# Altium PCB macropad.PcbDoc
Units mm, origin at the board's own origin, x right, y up, seen from the top; angles counter-clockwise.
Board outline 83 x 85 mm, 2 copper layers (Top Layer, Bottom Layer); 70 components, 69 nets, 364 pads, 191 vias.
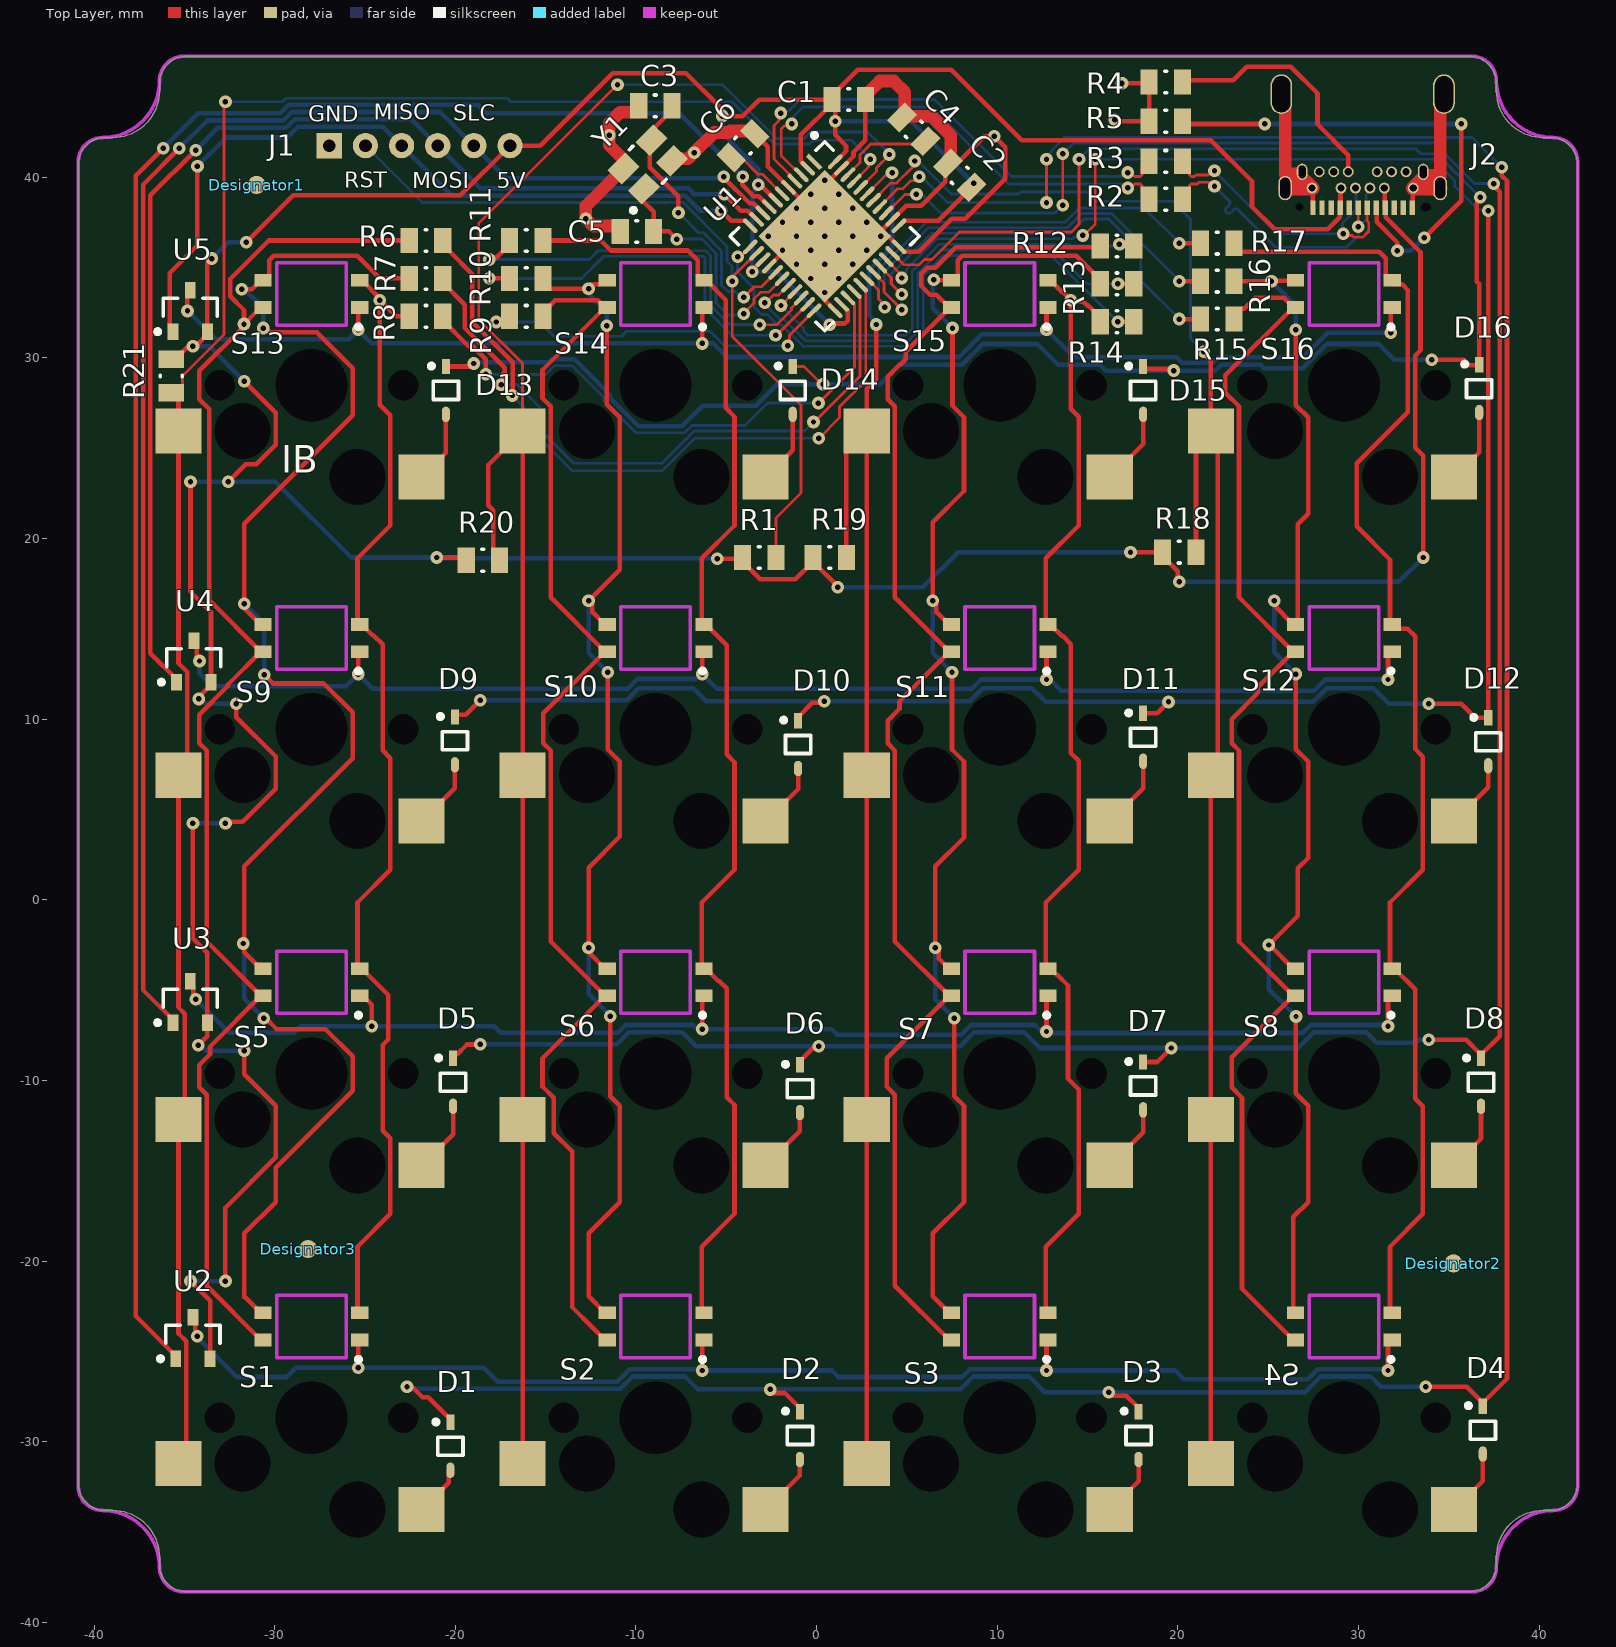
[diagram p0: Top Layer view]
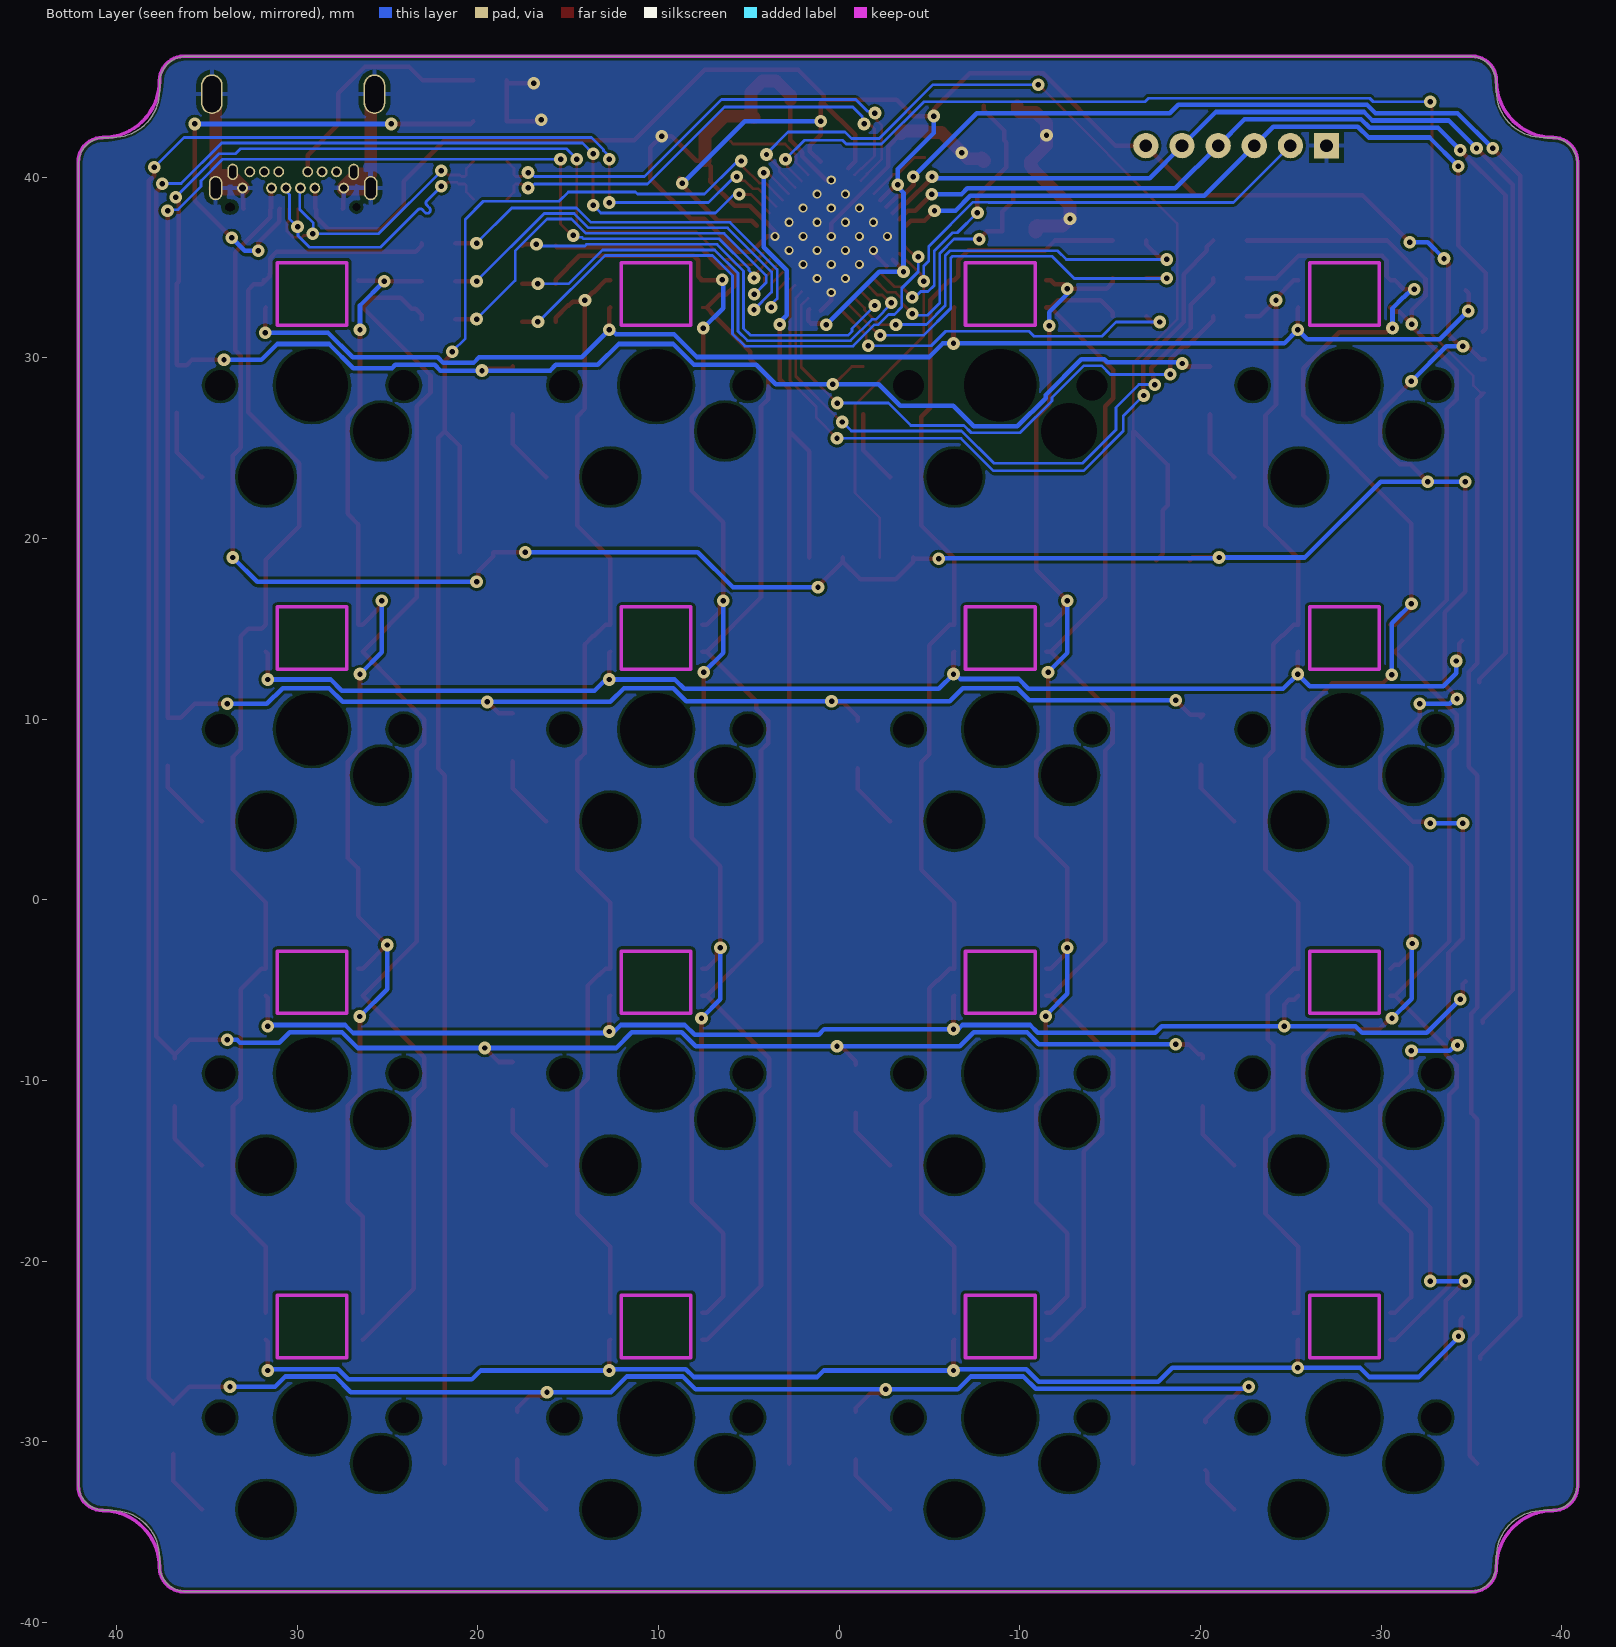
[diagram p1: Bottom Layer view, seen from below]
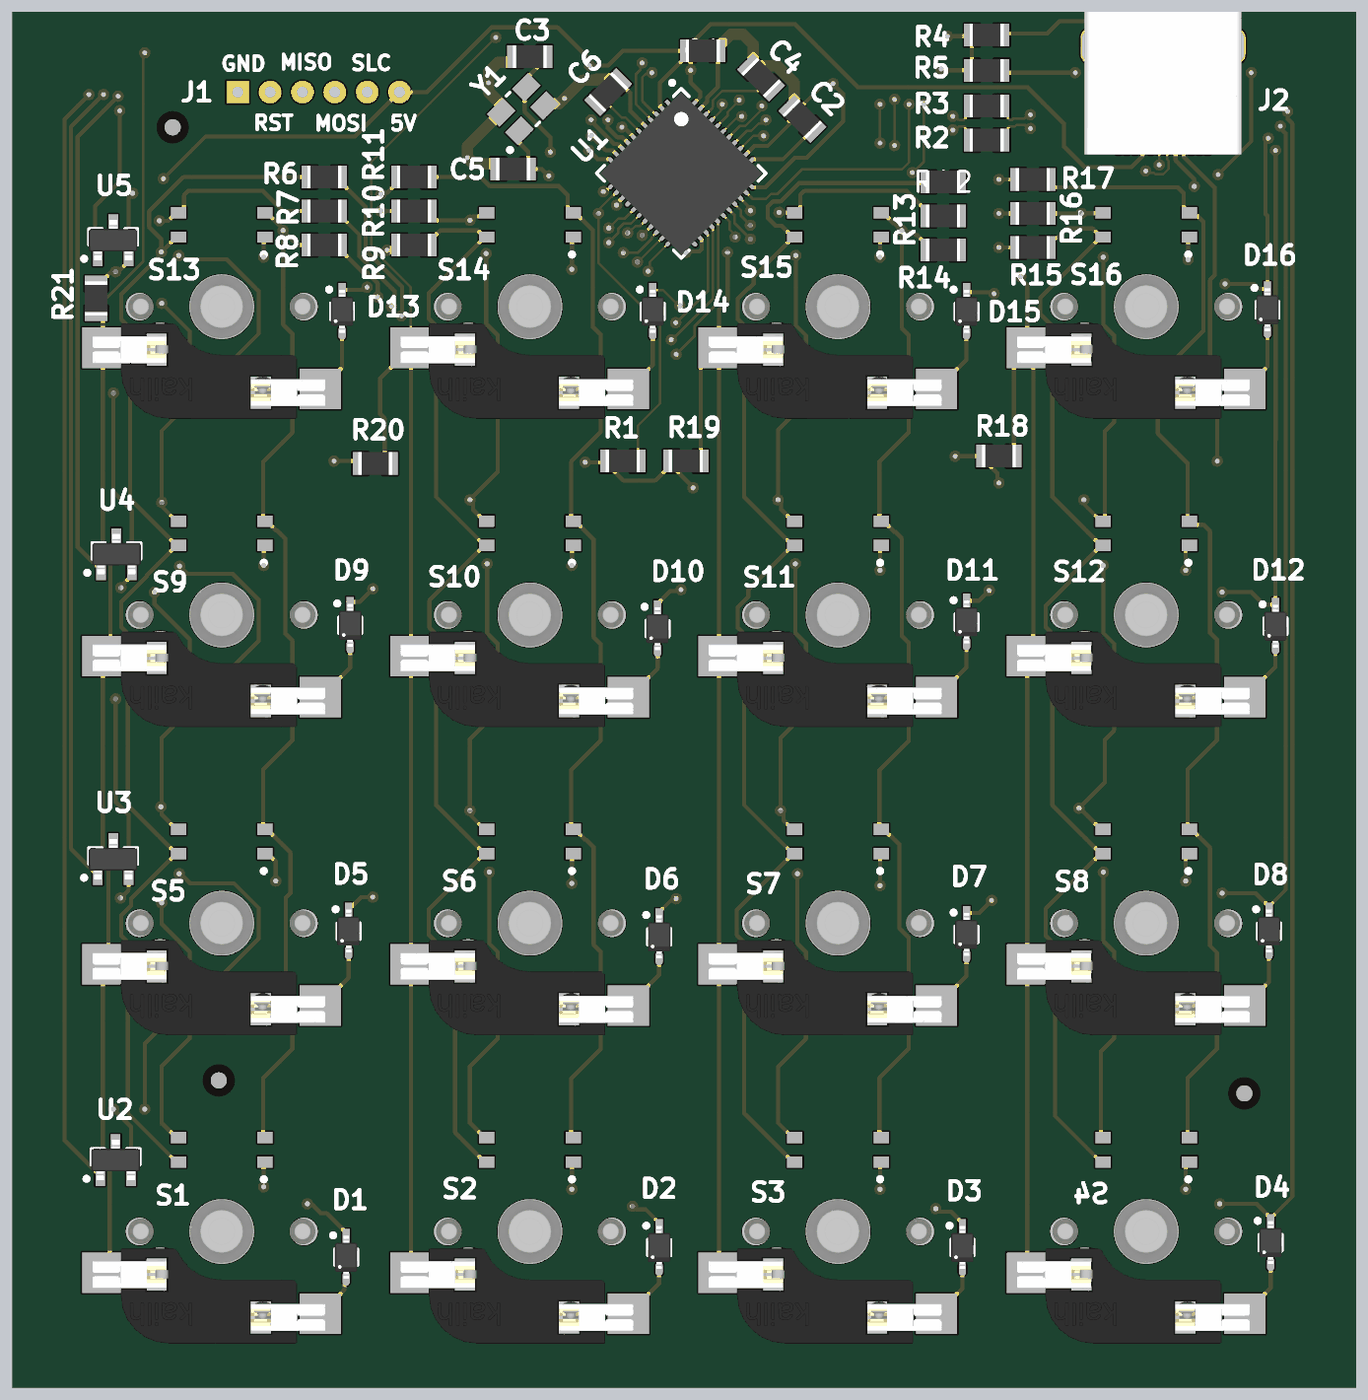
[diagram p2: 3D render of the assembled board from above, using the file's embedded part models]
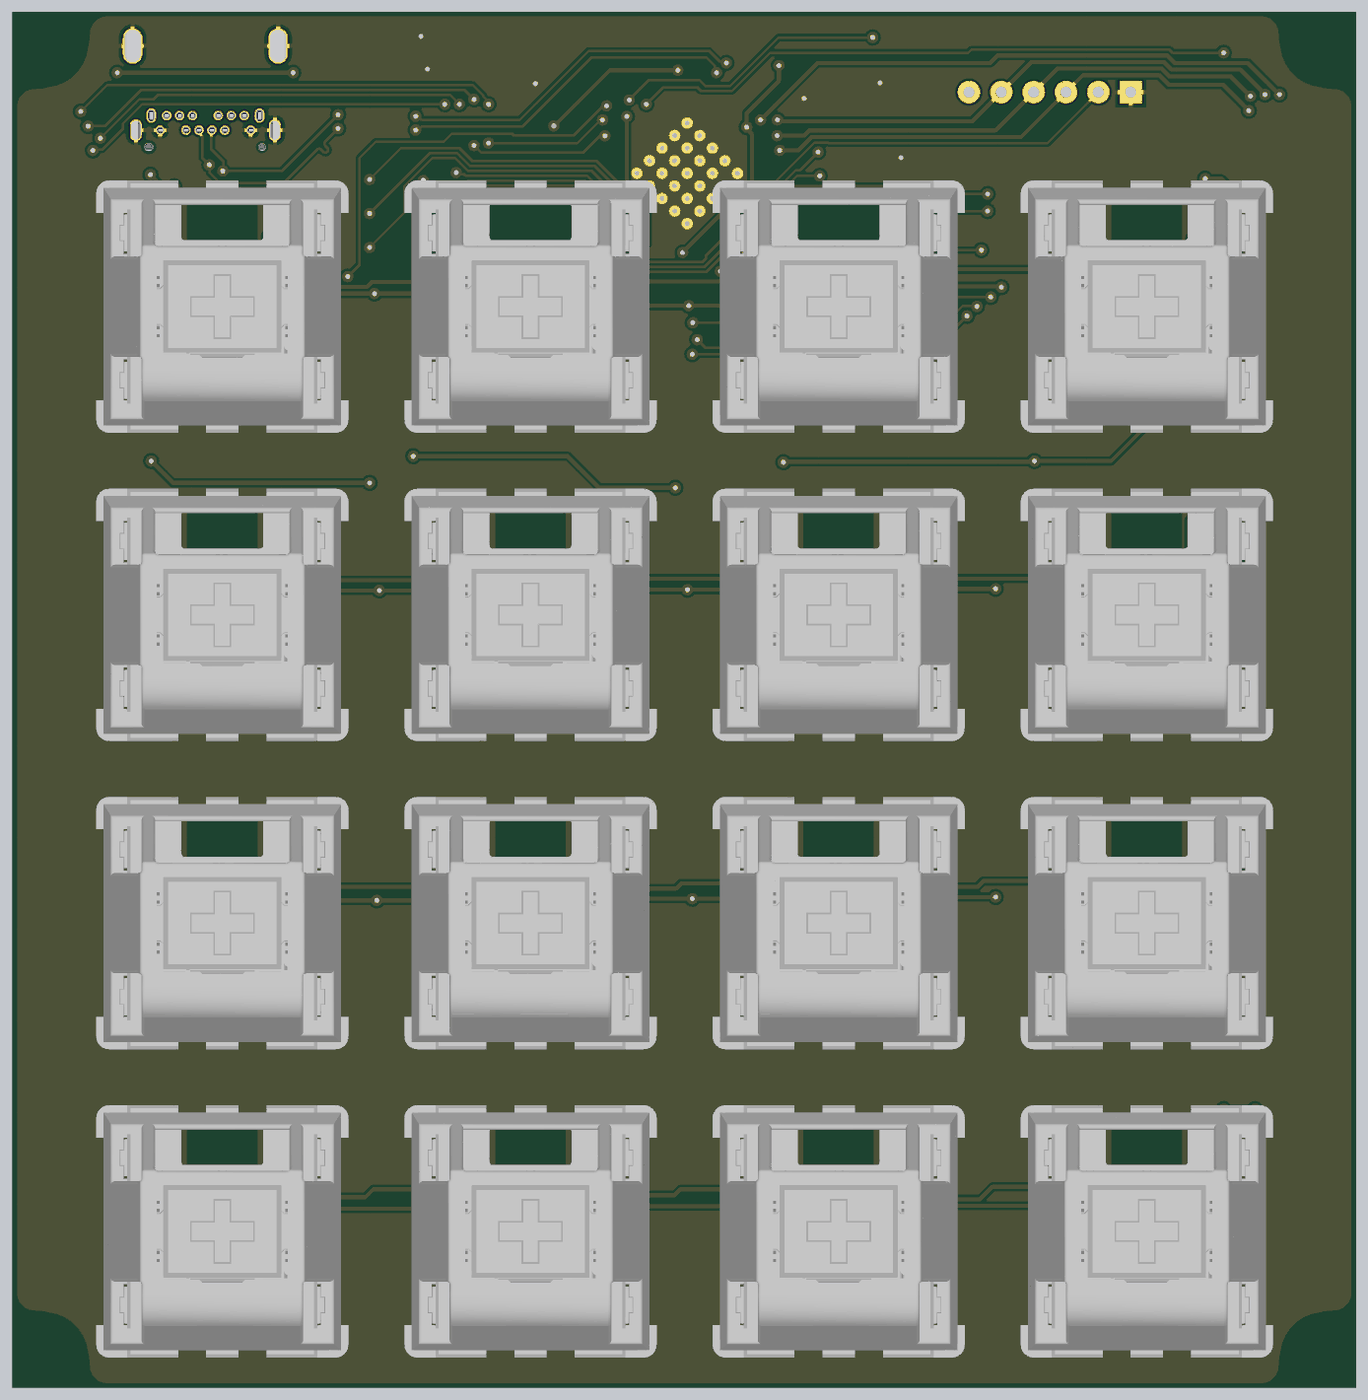
[diagram p3: 3D render of the assembled board from below, using the file's embedded part models]

## Layer stack, top to bottom
Top Solder: solder mask 0.0254, SM-002, Dk 4
Top Layer: signal copper 0.0356
Dielectric 1: dielectric 0.32, FR-4, Dk 4.8
Bottom Layer: signal copper 0.0356
Bottom Solder: solder mask 0.0254, SM-002, Dk 4

## Board outline
36.125,46.7 cw(c36.125,45.2) 37.625,45.2 37.625,44.791 ccw(c40.216,44.791) 40.216,42.2 40.625,42.2 cw(c40.625,40.7) 42.125,40.7 42.125,-32.3 cw(c40.625,-32.3) 40.625,-33.8 40.216,-33.8 ccw(c40.216,-36.391) 37.625,-36.391 37.625,-36.8 cw(c36.125,-36.8) 36.125,-38.3 -34.875,-38.3 cw(c-34.875,-36.8) -36.375,-36.8 -36.375,-36.391 ccw(c-38.966,-36.391) -38.966,-33.8 -39.375,-33.8 cw(c-39.375,-32.3) -40.875,-32.3 -40.875,40.7 cw(c-39.375,40.7) -39.375,42.2 -38.966,42.2 ccw(c-38.966,44.791) -36.375,44.791 -36.375,45.2 cw(c-34.875,45.2) -34.875,46.7

## Design rules (kind name [scope] priority, off if disabled: settings)
BoardOutlineClearance [All] p1: gap=0.152 ignorepadtopadclearanceinfootprint=FALSE
Clearance [All] p1: gap=0.152 ignorepadtopadclearanceinfootprint=FALSE
DiffPairsRouting [All] p1: maxlimit=1 minlimit=0.152 mostfreqgap=0.254 toplayer_minwidth=0.152 toplayer_maxwidth=1 toplayer_prefwidth=0.381 bottomlayer_minwidth=0.152 bottomlayer_maxwidth=1 bottomlayer_prefwidth=0.381 maxuncoupledlength=12.7
HoleSize [All] p1: absolutevalues=TRUE maxlimit=7 minlimit=0.152 maxpercent=80.000 minpercent=20.000
MatchedLengths [InDifferentialPair('No Differential Pair')] p1: tolerance=0.2 checknetsindiffpair=FALSE checkdiffpairvsdiffpair=TRUE checkxsignals=TRUE checkothers=TRUE usedelayunits=TRUE delaytolerance=0.200000
MinimumSolderMaskSliver [All] p1: minsoldermaskwidth=0.025
PlaneConnect [All] p1: pad.planeconnectstyle=Relief pad.reliefexpansion=0.508 pad.reliefentries=4 pad.reliefconductorwidth=0.254 pad.reliefairgap=0.254 via.planeconnectstyle=Direct via.reliefexpansion=0.508 via.reliefentries=4 via.reliefconductorwidth=0.254 via.reliefairgap=0.254
PolygonConnect [All] p1: thpad.connectstyle=Relief thpad.reliefconductorwidth=0.254 thpad.reliefentries=4 thpad.polygonreliefangle="90 Angle" thpad.airgapwidth=0.254 smdpad.connectstyle=Relief smdpad.reliefconductorwidth=0.254 smdpad.reliefentries=4 smdpad.polygonreliefangle="90 Angle" smdpad.airgapwidth=0.254 via.connectstyle=Direct via.reliefconductorwidth=0.254 via.reliefentries=4 via.polygonreliefangle="90 Angle" via.airgapwidth=0.254
RoutingVias [All] p1: holewidth=0.4 width=1 viastyle="Through Hole" minholewidth=0.3 minwidth=0.8 maxholewidth=5 maxwidth=10 useviatemplates=TRUE viatemplateguid#1={ED8CAE07-13D7-4C8F-8E3A-6E4CB1260C81} viatemplatename#1=30x70
SilkToSilkClearance [All] p1: silktosilkclearance=0.152
SilkToSolderMaskClearance [IsPad] p1: minsilkscreentomaskgap=0.025 clearancetoexposedcopper=TRUE
SolderMaskExpansion [All] p1: expansion=0.102 istentingtop=FALSE
Width Width_1 [All] p1: maxlimit=2.54 minlimit=0.152 preferedwidth=0.254
Width [All] p2: maxlimit=0.254 minlimit=0.254 preferedwidth=0.254
24 further rules are at their usual default settings.

## Classes and differential pairs
component class top: C1 C2 C3 C4 C5 C6 J1 J2 R1 R2 R3 R4 R5 U1 Y1
component class SW: D1 D2 D3 D4 D5 D6 D7 D8 D9 D10 D11 D12 D13 D14 D15 D16 R18 R19 R20 R21 S1 S2 S3 S4 S5 S6 S7 S8 S9 S10 S11 S12 S13 S14 S16
component class LED: R6 R7 R8 R9 R10 R11 R12 R13 R14 R15 R16 R17 U2 U3 U4 U5
differential pair USB: +USB_P -USB_N
differential pair USBC: +USBC_P -USBC_N

## Components (designator, comment, footprint, x,y, rotation, side; value= is the part's Value field where it differs from the comment)
C1 "1u" 0805 1.775,44.3 r180 top
C2 "100n" 0805 7.925,40.1 r315 top
C3 "18p" 0805 -8.925,43.95 r180 top
C4 "100n" 0805 5.375,42.65 r315 top
C5 "18p" 0805 -9.95,37 r180 top
C6 "1u" 0805 -4.075,41.75 r225 top
D1 "diode 1N4148" SOD-323_S130X260 -20.275,-30.25 r90 top
D2 "diode 1N4148" SOD-323_S130X260 -0.925,-29.65 r90 top
D3 "diode 1N4148" SOD-323_S130X260 17.825,-29.65 r90 top
D4 "diode 1N4148" SOD-323_S130X260 36.875,-29.35 r90 top
D5 "diode 1N4148" SOD-323_S130X260 -20.125,-10.1 r90 top
D6 "diode 1N4148" SOD-323_S130X260 -0.925,-10.45 r90 top
D7 "diode 1N4148" SOD-323_S130X260 18.075,-10.3 r90 top
D8 "diode 1N4148" SOD-323_S130X260 36.775,-10.1 r90 top
D9 "diode 1N4148" SOD-323_S130X260 -20.025,8.8 r90 top
D10 "diode 1N4148" SOD-323_S130X260 -1.025,8.6 r90 top
D11 "diode 1N4148" SOD-323_S130X260 18.075,9 r90 top
D12 "diode 1N4148" SOD-323_S130X260 37.175,8.75 r90 top
D13 "diode 1N4148" SOD-323_S130X260 -20.525,28.2 r90 top
D14 "diode 1N4148" SOD-323_S130X260 -1.325,28.2 r90 top
D15 "diode 1N4148" SOD-323_S130X260 18.075,28.2 r90 top
D16 "diode 1N4148" SOD-323_S130X260 36.675,28.3 r90 top
Designator1 "Comment" Fiducial -31,39.575 r0 top
Designator2 "Comment" Fiducial 35.25,-20.125 r0 top
Designator3 "Comment" Fiducial -28.15,-19.325 r0 top
J1 "atmel_prog" header6p0.2 -26.975,41.75 r0 top
J2 "USB-C" usb-c 31.025,40.3 r180 top
R1 "33K" 0805 -3.175,18.95 r0 top
R2 "22" 0805 19.325,38.784 r180 top
R3 "22" 0805 19.325,40.884 r180 top
R4 "5.1k" 0805 19.325,43.1 r180 top
R5 "5.1k" 0805 19.325,45.275 r180 top
R6 "150" 0805 -21.625,36.5 r180 top
R7 "100" 0805 -21.625,34.4 r180 top
R8 "100" 0805 -21.625,32.3 r180 top
R9 "150" 0805 -16.075,32.3 r0 top
R10 "100" 0805 -16.075,34.4 r0 top
R11 "100" 0805 -16.075,36.5 r0 top
R12 "150" 0805 16.625,36.2 r180 top
R13 "100" 0805 16.625,34.1 r180 top
R14 "100" 0805 16.625,32 r180 top
R15 "150" 0805 22.175,32.15 r0 top
R16 "100" 0805 22.175,34.25 r0 top
R17 "100" 0805 22.175,36.35 r0 top
R18 "10k" 0805 20.075,19.25 r180 top
R19 "10k" 0805 0.725,18.95 r180 top
R20 "10k" 0805 -18.475,18.8 r180 top
R21 "10k" 0805 -35.725,29 r90 top
S1 "cherry_mx+rgb" kailh_socket_mx+led -27.965,-28.66 r0 bottom
S2 "cherry_mx+rgb" kailh_socket_mx+led -8.915,-28.66 r0 bottom
S3 "cherry_mx+rgb" kailh_socket_mx+led 10.135,-28.66 r0 bottom
S4 "cherry_mx+rgb" kailh_socket_mx+led 29.185,-28.66 r0 bottom
S5 "cherry_mx+rgb" kailh_socket_mx+led -27.965,-9.61 r0 bottom
S6 "cherry_mx+rgb" kailh_socket_mx+led -8.915,-9.61 r0 bottom
S7 "cherry_mx+rgb" kailh_socket_mx+led 10.135,-9.61 r0 bottom
S8 "cherry_mx+rgb" kailh_socket_mx+led 29.185,-9.61 r0 bottom
S9 "cherry_mx+rgb" kailh_socket_mx+led -27.965,9.44 r0 bottom
S10 "cherry_mx+rgb" kailh_socket_mx+led -8.915,9.44 r0 bottom
S11 "cherry_mx+rgb" kailh_socket_mx+led 10.135,9.44 r0 bottom
S12 "cherry_mx+rgb" kailh_socket_mx+led 29.185,9.44 r0 bottom
S13 "cherry_mx+rgb" kailh_socket_mx+led -27.965,28.49 r0 bottom
S14 "cherry_mx+rgb" kailh_socket_mx+led -8.915,28.49 r0 bottom
S15 "cherry_mx+rgb" kailh_socket_mx+led 10.135,28.49 r0 bottom
S16 "cherry_mx+rgb" kailh_socket_mx+led 29.185,28.49 r0 bottom
U1 "ATmega32U4" QFN44P05P7X7 0.442,36.731 r315 top
U2 "P-mosfet_NX300PBK" SOT23(TO-236AB)P095S230x290 -34.525,-24.25 r90 top
U3 "P-mosfet_NX300PBK" SOT23(TO-236AB)P095S230x290 -34.675,-5.65 r90 top
U4 "P-mosfet_NX300PBK" SOT23(TO-236AB)P095S230x290 -34.475,13.2 r90 top
U5 "P-mosfet_NX300PBK" SOT23(TO-236AB)P095S230x290 -34.675,32.6 r90 top
Y1 "16MHz" SMD_crystal_P220x160S320x250 -9.35,40.7 r45 top

## Footprints (in the part's own frame and the unit in brackets; to place one, negate y for a bottom-side part, rotate by r counter-clockwise, add the part's x,y. Pads: shape width x height; smd on the part's side, far side on the other; paste and mask are expansions set on the pad)
0805 [mm] "Chip Resistor, 2-Leads, Body 2.00x1.25mm, IPC Medium Density"
  rect 0.95x1.4 smd: 1(-0.925,0) 2(0.925,0)
  silkscreen extent -0.05,-0.6 0.05,0.6, body extent -1.05,-0.7 1.05,0.7, height 0.6
Fiducial [mm]
  round 1 smd mask+0.5: Fiducial(0,0)
header6p0.2 [mm]
  rect 1.4x1.4 hole 0.7 paste-1: 1(0,0)
  round 1.4 hole 0.7 paste-1: 2(2,0) 3(4,0) 4(6,0) 5(8,0) 6(10,0)
kailh_socket_mx+led [mm]
  rect 2.55x2.5 smd far side: 1(-7.36,2.54) 2(6.09,5.08)
  rect 0.95x0.7 smd far side: +(2.675,-4.3) B(2.675,-5.8) G(-2.675,-5.8) R(-2.675,-4.3)
  round 0 hole 1.7 unplated paste-10 mask+0.9: ""(-5.08,0) ""(5.08,0)
  round 0 hole 3.1 unplated paste-10 mask+1.6: ""(-3.81,2.54) ""(2.54,5.08)
  round 0 hole 4 unplated paste-10 mask+2.05: ""(0,0)
  Keep-Out Layer lines w0.2: -1.925,-3.325 -1.925,-6.775 1.925,-6.775 1.925,-3.325 -1.925,-3.325
  body extent -7.99,-7.81 7.79,7.79, height 15.54
QFN44P05P7X7 [mm] "QFN, 44-Leads, Body 7.00x7.00mm, Pitch 0.50mm, Thermal Pad 5.20x5.20mm, IPC Medium Density"
  rect 1.05x0.25 smd: 1(-3.325,2.5)
  oval 1.05x0.25 smd: 2(-3.325,2) 3(-3.325,1.5) 4(-3.325,1) 5(-3.325,0.5) 6(-3.325,0) 7(-3.325,-0.5) 8(-3.325,-1) 9(-3.325,-1.5) 10(-3.325,-2) 11(-3.325,-2.5) 23(3.325,-2.5) 24(3.325,-2) 25(3.325,-1.5) 26(3.325,-1) 27(3.325,-0.5) 28(3.325,0) 29(3.325,0.5) 30(3.325,1) 31(3.325,1.5) 32(3.325,2) 33(3.325,2.5)
  oval 0.25x1.05 smd: 12(-2.5,-3.325) 13(-2,-3.325) 14(-1.5,-3.325) 15(-1,-3.325) 16(-0.5,-3.325) 17(0,-3.325) 18(0.5,-3.325) 19(1,-3.325) 20(1.5,-3.325) 21(2,-3.325) 22(2.5,-3.325) 34(2.5,3.325) 35(2,3.325) 36(1.5,3.325) 37(1,3.325) 38(0.5,3.325) 39(0,3.325) 40(-0.5,3.325) 41(-1,3.325) 42(-1.5,3.325) 43(-2,3.325) 44(-2.5,3.325)
  rect 5.2x5.2 smd paste-6 mask+0.102: 45(0,0)
  silkscreen extent -4.47,-3.7 3.7,3.7, body extent -3.57,-3.57 3.57,3.57, height 1
SMD_crystal_P220x160S320x250 [mm]
  rect 1.4x1.1 smd: 1(-1.1,-0.8) 2(1.1,-0.8) 3(1.1,0.8) 4(-1.1,0.8)
  silkscreen extent -2.47,-1.35 0.15,1.3
SOD-323_S130X260 [mm] "TSSOP, 2-Leads, Body 1.30x1.70mm, Pitch 0.00mm, IPC Medium Density"
  rect 0.85x0.45 smd: 1(1.325,0)
  oval 0.85x0.45 smd: 2(-1.325,0)
  silkscreen extent -0.5,-0.7 1.47,0.92, body extent -1.33,-0.7 1.33,0.7, height 1
SOT23(TO-236AB)P095S230x290 [mm] "SOT23, 3-Leads, Body 2.90x2.30mm, Pitch 0.95mm, IPC Medium Density"
  rect 0.9x0.6 smd: 1(-1.15,0.95) 2(-1.15,-0.95) 3(1.15,0)
  silkscreen extent -1.27,-1.5 0.7,1.92, body extent -1.25,-1.5 1.25,1.5, height 1.1
usb-c [mm]
  round 0 hole 0.45 paste-1: 13(4.3,1.95)
  round 0 hole 0.55 slot 0.45 at 90 deg paste-1: 14(-2.7,1.95)
  rect 0.3x0.8 smd: A1(-1.95,2) A2(-1.45,2) A3(-0.95,2) A4(-0.45,2) A5(0.05,2) A6(0.55,2) A7(1.05,2) A8(1.55,2) A9(2.05,2) A10(2.55,2) A11(3.05,2) A12(3.55,2)
  round 0.6 hole 0.4 paste-1: B1(3.6,0.9) B2(3.2,0) B3(2.4,0) B4(2,0.9) B5(1.6,0) B6(1.2,0.9) B7(0.4,0.9) B8(0,0) B9(-0.4,0.9) B10(-0.8,0) B11(-1.6,0) B12(-2,0.9)
  oval 1.2x2.2 hole 1 slot 2 at 90 deg paste-1: G(-3.7,-4.3) G(5.3,-4.3)
  oval 0.75x1.35 hole 0.55 slot 1.15 at 90 deg paste-1: G(-3.495,0.9) G(5.095,0.9)
  oval 0.6x0.9 hole 0.4 slot 0.7 at 90 deg paste-1: G(-2.55,0) G(4.15,0)
  body extent -4.02,-6.4 5.65,2.4, height 3.46

## Part data
C1 C2 C3 C4 C5 C6: library part cap
R1 R2 R3 R4 R5 R6 R7 R8 R9 R10 R11 R12 R13 R14 R15 R16 R17 R18 R19 R20 R21: library part res0805
Y1: library part xtal

## Via types
v1: diameter 0.7, hole 0.3, Top Layer to Bottom Layer, 166 vias
v2: diameter 0.5, hole 0.3, Top Layer to Bottom Layer, 25 vias

## Nets (pads, with @x,y where several pads share a name; then routed paths per layer and width w, separated by ;. In a path a pad name is that pad's centre, name@x,y a point inside that pad or via, vN(x,y) a via of type N, cw(c..) or ccw(c..) an arc to the next point about the centre after c; other vN are vias at no path point)
5V: C1.2 C2.2 J1.6 J2.A4 J2.A9 J2.B4 J2.B9 R1.1 R18.2 R19.2 R20.2 R21.2 U1.2 U1.7 U1.14 U1.24 U1.34 U1.44 U2.2 U3.2 U4.2 U5.2 | length 295.7
  Top Layer w0.254: R21.2 -35.5,29.925 v1@-34.86,30.565 ; v1(-34.66,-21.1) -33.575,-22.185 U2.2 ; v1(-34.66,23.15) -34.66,17.06 -33.525,15.925 U4.2 -33.525,11.9 -34.197,11.228 v1(-34.197,11.122) ; v1(-34.525,4.25) -34.525,-2.125 -33.725,-2.925 U3.2 -33.725,-7.55 v1(-34.225,-8.05) ; v1@-34.29,30.735 -33.725,31.3 U5.2 -33.725,35.25 v1(-33.475,35.5) ; v1(-32.725,-21.1) -32.725,-17.033 -29.946,-14.253 -29.946,-11.392 -31.675,-9.663 v1(-31.675,-8.35) ; v1(-32.725,4.25) -32.65,4.325 -31.763,4.325 -29.946,6.142 -29.946,7.938 -32.125,10.117 v1(-32.125,10.85) ; v1(-32.575,23.15) -31.604,24.121 -31.017,24.121 -29.946,25.192 -29.946,26.971 v1(-31.675,28.7) ; v1(-31.575,36.4) -28.967,39.008 -19.717,39.008 J1.6 -15.29,41.75 -11.286,45.754 -7.229,45.754 -5.452,43.977 -5.225,43.75 v1(-5.225,43.388) -4.088,43.388 -3.175,44.3 C1.2 ; v1(-21.025,18.95) -19.55,18.95 R20.2 ; v1(-5.503,18.878) -4.172,18.878 R1.1 -4.1,18.725 -3.125,17.75 -1.175,17.75 R19.2@-0.2,18.725 ; v1(-3.557,34.768) -3.557,34.851 -2.97,35.438 U1.14 ; v1(-3.234,39.588) -3.125,39.588 -2.266,38.729 U1.7 ; U1.2 -0.495,40.499 -0.881,40.885 -0.881,42.344 0.85,44.075 C1.2 ; R19.2 R19.2@-0.2,18.725 ; v1(0.725,31.838) 0.792,31.906 1.565,31.906 1.714,32.054 1.714,32.631 U1.24@1.66,32.684 ; U1.44 1.625,41.45 1.625,41.75 1.025,42.35 v1(1.025,43.1) 1.025,44.125 C1.2 ; v1(1.175,17.3) 1.175,17.35 R19.2@-0.2,18.725 ; U1.34 4.841,37.594 6.728,37.594 C2.2 8.579,39.554 v1(8.687,39.662) 8.825,39.8 C2.2@8.825,39.95 ; v1(17.375,19.25) R18.2 19.15,19.025 19.99,18.185 19.99,17.685 v1(20.075,17.6) ; J2.B4@29.025,39.35 28.998,39.323 28.998,38.273 28.975,38.25 28.952,38.227 28.952,37.782 28.295,37.125 25.35,37.125 24.1,38.375 24.1,39.775 21.825,42.05 11.35,42.05 7.446,45.954 2.279,45.954 1.562,45.237 0.85,44.525 C1.2 ; J2.B9@31.425,39.35 31.452,39.323 31.452,38.273 31.498,38.227 31.498,37.777 33.425,35.85 33.425,30.425 33.125,30.125 33.125,25.025 33.575,24.575 v1(33.575,18.95)
  Bottom Layer w0.254: v1(-34.66,-21.1) v1(-32.725,-21.1) ; v1(-34.66,23.15) v1(-32.575,23.15) -29.965,23.15 -25.765,18.95 v1(-21.025,18.95) -20.989,18.914 -5.539,18.914 v1(-5.503,18.878) ; v1(-34.525,4.25) v1(-32.725,4.25) ; v1(-34.525,30.65) -33.608,30.65 -31.675,28.717 v1(-31.675,28.7) ; v1(-34.225,-8.05) -34.104,-8.05 -33.804,-8.35 v1(-31.675,-8.35) ; v1(-34.197,11.122) -34.077,11.122 -33.804,10.85 v1(-32.125,10.85) ; v1(-33.475,35.5) -32.575,36.4 v1(-31.575,36.4) ; v1(-5.225,43.388) -5.225,42.448 -3.234,40.456 v1(-3.234,39.588) ; v1@-3.222,39.588 v1(-3.234,39.588) ; v1(0.725,31.838) -2.205,34.768 v1(-3.557,34.768) -3.557,39.145 -3.234,39.468 v1(-3.234,39.588) ; v1(1.025,43.1) 5.225,43.1 8.663,39.662 v1(8.687,39.662) ; v1(1.175,17.3) 5.882,17.3 7.832,19.25 v1(17.375,19.25) ; v1(20.075,17.6) 32.225,17.6 v1(33.575,18.95)
GND: C1.1 C2.1 C3.2 C4.1 C5.2 C6.1 J1.1 J2.A1 J2.A12 J2.B1 J2.B12 J2.G R4.2 R5.2 U1.5 U1.15 U1.23 U1.33 U1.35 U1.43 U1.45 Y1.2 Y1.4 | length 85.2
  Top Layer w0.254: C6.1 -2.716,41.699 -2.716,40.595 0.442,37.438 v2(0.442,36.731) ; U1.15 -1.892,35.812 v2(-1.892,35.953) ; v2(0.442,33.62) 0.442,33.198 1.025,32.615 U1.23 ; v2(0.442,39.842) 0.724,39.842 U1.43 2.041,41.159 2.041,41.387 2.7,42.046 C1.1 ; v2(3.553,36.731) 3.977,36.731 U1.33 4.841,35.868 5.643,35.868 7.475,37.7 8.225,37.7 10.45,39.925 10.45,41.65 v1(9.825,42.275) 9.275,42.275 7.913,40.913 7.43,40.913 C2.1 7.112,40.595 7.112,39.938 7.125,39.925 7.125,39.76 5.786,38.421 4.96,38.421 U1.35 U1.45@3.553,37.014 ; v1(16.5,43.175) 16.575,43.1 R4.2 R5.2@18.4,45.375 ; v1(16.9,45.2) 18.325,45.2 R5.2 ; J2.G@25.725,44.55 J2.G@25.835,44.44 ; J2.G@25.835,39.445 J2.G@25.93,39.35 ; J2.G@25.93,39.516 J2.G@26.159,39.745 ; J2.G@26.875,40.1 J2.G@26.875,40.25 ; J2.B1@27.375,39.4 27.452,39.323 27.452,38.273 J2.A12@27.475,38.25 ; J2.A1@32.975,38.25 32.998,38.273 32.998,39.323 J2.B12@33.025,39.35 ; J2.G@33.509,40.127 J2.G@33.575,40.194 ; J2.G@34.52,39.35 J2.G@34.615,39.445 ; J2.G@34.615,44.44 J2.G@34.725,44.55
  Top Layer w0.7: C5.2@-10.95,37.3 -12.375,37.3 v1(-12.775,37.7) -12.775,38.406 Y1.4 -10.738,40.488 -10.587,40.638 -10.587,40.877 -11.475,41.764 v1(-11.475,42.325) -11.475,43 -10.875,43.6 -9.975,43.6 -9.85,43.725 C3.2 ; Y1.2@-7.9,41.018 -7.125,41.018 v1(-6.781,41.363) -5.664,42.479 -4.857,42.479 -4.773,42.563 -3.58,42.563 C6.1 ; C1.1 2.7,44.525 3.5,45.325 4.26,45.325 4.88,44.705 C4.1@4.88,43.463 ; C4.1 C4.1@4.88,43.463 ; C2.1@7.43,40.913 7.43,42.295 6.35,43.375 5.145,43.375 5.057,43.463 C4.1@4.88,43.463 ; J2.G@25.725,44.6 25.725,44.55 25.725,43.965 25.93,43.76 25.93,40.15 ; J2.G@34.52,40.05 34.52,43.76 34.725,43.965 34.725,44.55 J2.G@34.725,44.6
  Top Layer w0.8: C5.2@-10.95,37.3 -10.875,37.225 C5.2 ; Y1.2 Y1.2@-7.9,41.018 ; J2.G@25.93,39.4 27.375,39.4 J2.B1 26.675,40.15 26.3,40.15 ; 34.1,40.05 33.675,40.05 J2.B12 J2.G@34.52,39.4
  other v2: -0.336,34.398 1.219,34.398 -1.114,35.175 0.442,35.175 1.997,35.175 -0.336,35.953 1.219,35.953 2.775,35.953 -2.67,36.731 -1.114,36.731 1.997,36.731 -1.892,37.509 -0.336,37.509 1.219,37.509 2.775,37.509 -1.114,38.287 0.442,38.287 1.997,38.287 -0.336,39.065 1.219,39.065
NetC3_1: C3.1 U1.16 Y1.3 | length 16.3
  Top Layer w0.152: v1@-3.824,33.35 v1(-4.041,33.35) -3.454,33.937 -3.06,33.937 U1.16
  Top Layer w0.254: C3.1 -8,43.725 -9.138,42.587 Y1.3 -9.244,41.937 -9.244,40.549 -7.65,38.955 v1(-7.65,38.044)
  Bottom Layer w0.152: v1(-7.65,38.044) -6.533,36.927 -6.273,36.927 -5.261,35.914 -5.261,34.017 -4.915,33.671 -4.51,33.671 -4.189,33.35 v1(-4.041,33.35)
NetC4_2: C4.2 U1.42 | length 5.3
  Top Layer w0.152: U1.42 2.396,40.807 2.396,41.24 2.994,41.837 5.87,41.837 C4.2
NetC5_1: C5.1 U1.17 Y1.1 | length 14.3
  Top Layer w0.152: v1(-4.041,32.45) -3.462,33.029 -3.462,33.281 -3.115,33.628 -2.661,33.628 U1.17
  Top Layer w0.254: Y1.1 -9.632,39.286 -9.632,38.688 -9.025,38.081 C5.1 -8.175,37 v1(-7.75,36.575)
  Bottom Layer w0.152: v1(-7.75,36.575) -6.352,36.575 -5.565,35.788 -5.565,33.04 -4.888,32.363 -4.128,32.363 v1(-4.041,32.45)
NetC6_2: C6.2 U1.6 | length 3.7
  Top Layer w0.152: C6.2 -4.165,41.096 -3.236,40.167 -2.994,40.167 U1.6
NetD1_1: D1.1 D2.1 D3.1 D4.1 U1.37 | length 178.3
  Top Layer w0.152: U1.37 4.491,39.367 4.789,39.367 5.233,39.811 5.591,39.811 5.678,39.898 v1(5.678,40.029) ; v1(12.725,38.6) v1(12.725,41)
  Top Layer w0.254: v1(-22.675,-26.95) -22.4,-26.95 -21.82,-27.531 -21.494,-27.531 -20.275,-28.75 D1.1 ; v1(-2.575,-27.1) -2.381,-27.294 -1.756,-27.294 -0.925,-28.125 D2.1 ; v1(16.175,-27.25) 16.369,-27.444 17.144,-27.444 17.825,-28.125 D3.1 ; v1(33.725,-26.95) 35.987,-26.95 36.875,-27.838 36.875,-27.878 36.875,-27.825 36.973,-27.727 36.998,-27.727 38.215,-26.51 38.215,39.8 37.925,40.09 v1(37.925,40.55)
  Bottom Layer w0.152: v1(5.678,40.029) 5.791,39.916 5.917,39.916 7.233,38.6 v1(12.725,38.6) ; v1(12.725,41) 12.725,41.148 13.046,41.47 13.046,41.54 13.707,42.2 36.275,42.2 v1(37.925,40.55)
  Bottom Layer w0.254: v1(-22.675,-26.95) -22.554,-27.071 -10.878,-27.071 -10.188,-26.381 -7.288,-26.381 -6.568,-27.1 v1(-2.575,-27.1) 7.939,-27.1 8.658,-26.381 11.762,-26.381 12.632,-27.25 27.035,-27.25 27.904,-26.381 30.662,-26.381 31.232,-26.95 v1(33.725,-26.95)
NetD1_2: D1.2 S1.2 | length 2.8
  Top Layer w0.254: S1.2 -21.85,-33.74 -20.373,-32.263 -20.373,-31.673 D1.2
NetD2_2: D2.2 S2.2 | length 3.6
  Top Layer w0.254: S2.2 -2.8,-33.74 -0.925,-31.865 D2.2
NetD3_2: D3.2 S3.2 | length 3.4
  Top Layer w0.254: S3.2 16.25,-33.74 17.825,-32.165 D3.2
NetD4_2: D4.2 S4.2 | length 3.7
  Top Layer w0.254: S4.2 35.3,-33.74 36.875,-32.165 D4.2
NetD5_1: D5.1 D6.1 D7.1 D8.1 U1.36 | length 150.4
  Top Layer w0.152: U1.36 4.882,39.05 v1(5.525,39.05) ; v1(13.625,38.45) v1(13.625,41.3)
  Top Layer w0.254: D5.1 -20.125,-8.628 -20.034,-8.537 -19.887,-8.537 -19.356,-8.006 -18.64,-8.006 v1(-18.625,-7.991) ; D6.1 -0.925,-8.925 v1@-0.179,-8.179 ; D7.1 18.85,-8.975 v1(19.625,-8.2) ; v1(33.875,-7.75) 35.95,-7.75 D8.1@36.775,-8.575 ; D8.1 D8.1@36.775,-8.575 ; v1(37.475,39.65) 37.475,39.529 37.809,39.196 37.809,-7.541 D8.1@36.775,-8.575
  Bottom Layer w0.152: v1(5.525,39.05) 5.825,39.05 6.854,38.021 13.196,38.021 v1(13.625,38.45) ; v1(13.625,41.3) 14.22,41.895 34.181,41.895 36.426,39.65 v1(37.475,39.65)
  Bottom Layer w0.254: v1(-18.625,-7.991) -11.052,-7.991 -10.392,-7.331 -7.438,-7.331 -6.674,-8.094 v1(0.125,-8.094) 7.949,-8.094 8.712,-7.331 11.477,-7.331 12.346,-8.2 v1(19.625,-8.2) 26.656,-8.2 27.525,-7.331 30.413,-7.331 30.996,-7.914 33.168,-7.914 33.332,-7.75 v1(33.875,-7.75)
NetD5_2: D5.2 S5.2 | length 4
  Top Layer w0.254: S5.2 -21.85,-14.69 -20.125,-12.965 D5.2
NetD6_2: D6.2 S6.2 | length 3.7
  Top Layer w0.254: S6.2 -2.8,-14.69 -0.925,-12.815 D6.2
NetD7_2: D7.2 S7.2 | length 3.8
  Top Layer w0.254: S7.2 16.25,-14.69 18.075,-12.865 D7.2
NetD8_2: D8.2 S8.2 | length 3.9
  Top Layer w0.254: S8.2 35.3,-14.69 36.775,-13.215 D8.2
NetD9_1: D9.1 D10.1 D11.1 D12.1 U1.31 | length 132.1
  Top Layer w0.152: U1.31 4.613,34.681 4.613,34.516 4.704,34.424 v1(4.717,34.424) ; v1(14.723,36.779) 14.781,36.779 15.425,37.423 v1(15.425,41)
  Top Layer w0.254: D9.1 -20.15,10.25 -19.434,10.25 v1(-18.625,11.059) ; D10.1 -1.025,10.125 -0.235,10.915 0.34,10.915 v1(0.425,11) ; D11.1 18.844,10.325 v1(19.475,10.956) ; v1(33.875,10.85) 35.675,10.85 36.45,10.075 D12.1 37.175,20.198 37.179,20.202 v1(37.179,38.146)
  Bottom Layer w0.152: v1@4.822,34.529 v1(4.717,34.424) 4.717,34.572 4.991,34.846 4.991,34.939 6.642,36.589 14.145,36.589 14.231,36.675 14.618,36.675 v1(14.723,36.779) ; v1(15.425,41) 15.43,40.995 34.13,40.995 35.324,39.801 35.324,39.482 36.601,38.206 37.119,38.206 v1(37.179,38.146)
  Bottom Layer w0.254: v1(-18.625,11.059) -10.52,11.059 -9.859,11.719 -6.838,11.719 -6.118,11 v1(0.425,11) 8.471,11 9.191,11.719 11.912,11.719 12.676,10.956 v1(19.475,10.956) 27.478,10.956 28.241,11.719 30.812,11.719 31.682,10.85 v1(33.875,10.85)
NetD9_2: D9.2 S9.2 | length 3.9
  Top Layer w0.254: S9.2 -21.85,4.36 -20.025,6.185 D9.2
NetD10_2: D10.2 S10.2 | length 3.7
  Top Layer w0.254: S10.2 -2.8,4.36 -1.025,6.135 D10.2
NetD11_2: D11.2 S11.2 | length 4.1
  Top Layer w0.254: S11.2 16.25,4.36 18.075,6.185 D11.2
NetD12_2: D12.2 S12.2 | length 3.9
  Top Layer w0.254: S12.2 35.3,4.36 37.175,6.235 D12.2
NetD13_1: D13.1 D14.1 D15.1 D16.1 U1.32 | length 114.4
  Top Layer w0.152: D14.1 -0.7,29.525 0.275,28.55 v1(0.35,28.55) ; U1.32 4.851,35.15 5.675,35.15 5.975,35.45 6.375,35.45 7.9,36.975 14.1,36.975 14.525,37.4 v1(14.525,41)
  Top Layer w0.254: D13.1 v1@-19.271,29.525 ; D15.1 18.075,29.476 18.166,29.385 19.69,29.385 v1(19.775,29.3) ; v1(34.054,29.9) 35.825,29.9 36.125,29.6 36.65,29.6 D16.1 36.675,34.098 36.55,34.223 36.55,38.604 36.725,38.779 v1(36.725,38.9)
  Bottom Layer w0.152: v1(14.525,41) 15.104,41.579 33.146,41.579 33.425,41.3 34.325,41.3 v1(36.725,38.9)
  Bottom Layer w0.254: v1(-18.983,29.692) -18.925,29.75 -14.841,29.75 -14.667,29.924 -13.401,29.924 -11.422,27.945 -11.422,27.773 -9.859,26.211 -7.455,26.211 -6.305,27.361 -3.367,27.361 -2.178,28.55 v1(0.35,28.55) 3.518,28.55 4.587,29.619 8.041,29.619 9.191,30.769 12.212,30.769 13.362,29.619 15.683,29.619 16.002,29.3 v1(19.775,29.3) 22.075,29.3 22.394,29.619 24.573,29.619 24.758,29.434 26.906,29.434 28.241,30.769 31.112,30.769 31.982,29.9 v1(34.054,29.9)
NetD13_2: D13.2 S13.2 | length 4
  Top Layer w0.254: S13.2 -21.85,23.41 -20.525,24.735 D13.2
NetD14_2: D14.2 S14.2 | length 4.1
  Top Layer w0.254: S14.2 -2.8,23.41 -1.325,24.885 D14.2
NetD15_2: D15.2 S15.2 | length 4.2
  Top Layer w0.254: S15.2 16.25,23.41 18.075,25.235 D15.2
NetD16_2: D16.2 S16.2 | length 4.2
  Top Layer w0.254: S16.2 35.3,23.41 36.675,24.785 D16.2
NetJ1_2: J1.2 R1.2 U1.13 | length 43.9
  Top Layer w0.152: U1.13 -3.839,35.279 -3.865,35.279 -4.57,34.573 -4.57,34.355 v1(-4.675,34.25) -4.675,31.198 -0.871,27.395 -0.871,22.515 -2.25,21.137 R1.2
  Bottom Layer w0.152: J1.2 -21.825,38.6 -8.275,38.6 -8.253,38.622 -7.411,38.622 -4.956,36.167 -4.956,35.363 -4.68,35.087 -4.68,34.255 v1(-4.675,34.25)
NetJ1_3: J1.3 U1.11 U5.1 | length 43.6
  Top Layer w0.254: U5.1 -35.798,31.623 -35.798,34.699 -34.275,36.222 v1(-34.275,40.6) ; v1(-5.275,38.15) -4.719,37.594 -3.957,37.594 U1.11
  Bottom Layer w0.254: v1(-34.275,40.6) -32.675,42.2 -29.312,42.2 -28.712,42.8 -24.025,42.8 J1.3 -20.203,38.978 -7.263,38.978 -6.436,38.15 v1(-5.275,38.15)
NetJ1_4: J1.4 U1.10 U4.1 | length 65.1
  Top Layer w0.254: U4.1 -35.425,12.2 -36.879,13.654 -36.879,38.996 v1(-34.375,41.5) ; v1(-5.115,39.06) -4.201,38.146 -3.805,38.146 -3.327,37.668 U1.10
  Bottom Layer w0.254: v1(-34.375,41.5) -33.146,42.729 -29.357,42.729 -28.88,43.206 -22.431,43.206 J1.4 -18.609,39.384 -7.095,39.384 -6.771,39.06 v1(-5.115,39.06)
NetJ1_5: J1.5 U1.9 U3.1 | length 85.5
  Top Layer w0.254: U3.1 -35.625,-6.65 -37.286,-4.989 -37.286,39.589 v1(-35.275,41.6) ; v1(-5.136,40.037) -5.12,40.021 -5.12,39.955 -3.718,38.552 -3.504,38.552 -2.973,38.022 U1.9
  Bottom Layer w0.254: v1(-35.275,41.6) -33.731,43.144 -29.518,43.144 -29.048,43.613 -20.838,43.613 J1.5 -17.18,39.955 -5.218,39.955 v1(-5.136,40.037)
NetJ2_A5: J2.A5 R4.1 | length 27.2
  Top Layer w0.254: R4.1 20.4,42.95 v1(24.8,42.95) ; J2.A5@30.975,38.25 30.998,38.227 30.998,37.531 32.15,36.379 v1(32.15,35.925) ; v1(33.625,36.65) 35.675,38.7 v1(35.675,42.95)
  Bottom Layer w0.254: v1(24.8,42.95) v1(35.675,42.95) ; v1(32.15,35.925) 32.9,35.925 v1(33.625,36.65)
NetJ2_B5: J2.B5 R5.1 | length 13.5
  Top Layer w0.254: R5.1@20.25,45.375 23.066,45.375 23.816,46.125 26.25,46.125 27.724,44.651 27.724,42.926 29.425,41.225 J2.B5
NetR6_1: R6.1 U1.27 | length 39.8
  Top Layer w0.152: v1(0.125,25.55) 1.271,26.696 1.271,27.295 2.722,28.745 2.722,33.744 U1.27
  Top Layer w0.254: R6.1 -20.352,36.152 -20.352,35.927 -19.062,34.637 -19.062,31.987 -16.825,29.75 -16.825,27.95 -16.854,27.921 v1(-16.854,27.919)
  Bottom Layer w0.152: v1(-16.854,27.919) -15.723,26.788 -15.723,25.948 -13.525,23.75 -8.55,23.75 -6.75,25.55 v1(0.125,25.55)
NetR6_2: R6.2 S1.R S5.R S9.R S13.R | length 80
  Top Layer w0.254: S1.R@-30.515,-24.36 -30.765,-24.36 -33.771,-21.354 -33.771,-10.784 -34.174,-10.38 -34.174,-9.142 -33.579,-8.546 -33.579,-8.124 S5.R@-30.765,-5.31 ; S5.R@-30.515,-5.31 S5.R@-30.765,-5.31 ; S13.R@-30.515,32.79 -30.738,32.567 -31.004,32.567 v1(-31.698,31.873) ; R6.2 -30.325,36.5 -32.454,34.371 -32.454,33.405 -31.698,32.649 v1(-31.698,31.873) ; v1(-31.698,31.873) -31.698,31.757 -34.174,29.281 -34.174,27.72 -33.625,27.17 -33.625,16.6 -30.765,13.74 -32.581,11.924 -32.581,11.849 -34.174,10.255 -34.174,8.67 -33.771,8.266 -33.771,-2.304 S5.R@-30.765,-5.31
NetR7_1: R7.1 U1.26 | length 36.6
  Top Layer w0.152: v1(-0.175,26.45) -0.131,26.45 2.406,28.987 2.406,33.327 2.086,33.647 U1.26
  Top Layer w0.254: R7.1 -20.7,34.175 -19.469,32.944 -19.469,31.654 -17.275,29.46 -17.275,29.206 -17.383,29.098 -17.383,28.594 v1(-17.469,28.509)
  Bottom Layer w0.152: v1(-17.469,28.509) -17.449,28.529 -16.585,28.529 -15.316,27.259 -15.316,26.026 -13.462,24.171 -8.56,24.171 -6.775,25.957 -0.668,25.957 v1(-0.175,26.45)
NetR7_2: R7.2 S1.G S5.G S9.G S13.G | length 92.2
  Top Layer w0.254: v1(-31.825,33.8) -31.255,33.8 -30.765,34.29 S13.G -30.515,34.29 -30.292,34.513 -30.292,35.4 -30.047,35.644 -25.424,35.644 -24.18,34.4 R7.2 ; v1(-31.731,-2.415) -31.675,-2.359 -31.675,1.852 -25.686,7.841 -25.686,10.384 -27.276,11.975 -30.075,11.975 -30.554,12.454 v1(-30.575,12.454) ; v1@-31.682,-2.367 -31.682,-2.893 -30.988,-3.587 -30.738,-3.587 S5.G@-30.515,-3.81 ; v1(-30.625,31.653) -30.504,31.653 -30.277,31.425 -27.676,31.425 -25.686,29.434 -25.686,26.816 -31.675,20.827 v1(-31.675,16.4) -31.675,16.15 -30.765,15.24 S9.G@-30.515,15.24 ; v1(-30.6,-6.55) -30.5,-6.55 -29.9,-7.15 -27.201,-7.15 -25.686,-8.666 -25.686,-10.568 -29.946,-14.828 -29.946,-16.73 -31.675,-18.459 -31.675,-22 -31.625,-22 -30.765,-22.86 S1.G@-30.515,-22.86
  Bottom Layer w0.254: v1(-31.825,33.8) -31.704,33.8 -31.254,33.35 -31.218,33.35 -30.625,32.757 v1(-30.625,31.653) ; v1(-31.731,-2.415) -31.685,-2.461 -31.685,-5.465 v1(-30.6,-6.55) ; v1(-31.675,16.4) -30.649,15.374 -30.575,15.3 v1(-30.575,12.454)
NetR8_1: R8.1 U1.25 | length 32.1
  Top Layer w0.152: v1(0.1,27.5) 0.118,27.5 2.101,29.483 2.101,32.924 1.732,33.293 U1.25
  Top Layer w0.254: R8.1 -20.7,32.075 -19.269,30.644 -19.044,30.644 -18.325,29.925 v1(-18.325,29.087)
  Bottom Layer w0.152: v1(-18.325,29.087) -15.001,29.087 -14.52,29.569 -13.548,29.569 -11.777,27.798 -11.777,27.626 -10.006,25.855 -7.307,25.855 -6.901,26.261 -3.963,26.261 -2.725,27.5 v1(0.1,27.5)
NetR8_2: R8.2 S1.B S5.B S9.B S13.B | length 64.6
  Top Layer w0.254: S13.B@-25.415,34.29 -25.165,34.29 -24.175,33.3 v1(-24.175,33.2) ; S1.B@-25.165,-22.86 -25.415,-22.86 -25.415,-19.194 -23.596,-17.375 -23.596,-13.188 -24.014,-12.769 -24.014,-8.034 -23.711,-7.73 -23.711,-5.264 -25.165,-3.81 -25.415,-3.81 -25.415,-0.144 -23.596,1.675 -23.596,7.848 -24.025,8.277 -24.025,14.15 -24.533,14.658 -24.583,14.658 -25.165,15.24 -25.415,15.24 -25.415,18.906 -23.596,20.725 -23.596,26.823 -24.175,27.402 v1(-24.175,33.2) ; R8.2 -23.275,32.3 v1(-24.175,33.2)
NetR9_1: R9.1 U1.22 | length 20.3
  Top Layer w0.152: v1(-1.604,30.679) -1.499,30.784 -1.499,31.255 U1.22
  Top Layer w0.254: v1(-17.739,31.986) -17.314,31.986 R9.1
  Bottom Layer w0.152: v1(-17.739,31.986) -15.331,31.986 -14.542,31.196 -10.79,31.196 -10.511,31.475 -5.897,31.475 -5.094,30.671 -1.612,30.671 v1(-1.604,30.679)
NetR9_2: R9.2 S2.R S6.R S10.R S14.R | length 70.8
  Top Layer w0.254: R9.2 -15.15,32.525 -14.475,33.2 -12.125,33.2 S14.R@-11.715,32.79 ; S2.R@-11.465,-24.36 -11.715,-24.36 -12.401,-23.674 -13.539,-22.536 -13.539,-13.923 -14.554,-12.908 -14.554,-10.95 -15.175,-10.33 -15.175,-8.77 S6.R@-11.715,-5.31 ; S6.R@-11.465,-5.31 S6.R@-11.715,-5.31 ; S10.R@-11.465,13.74 S10.R@-11.715,13.74 ; S14.R@-11.465,32.79 S14.R@-11.715,32.79 ; S6.R@-11.715,-5.31 -14.721,-2.304 -14.721,8.266 -15.124,8.67 -15.124,10.331 S10.R@-11.715,13.74 ; S10.R@-11.715,13.74 -14.721,16.746 -14.721,27.316 -15.175,27.77 -15.175,29.33 S14.R@-11.715,32.79
NetR10_1: R10.1 U1.21 | length 23.4
  Top Layer w0.152: v1(-2.275,31.25) -2.237,31.25 -0.522,32.966 U1.21
  Top Layer w0.254: v1(-18.128,34.4) R10.1
  Bottom Layer w0.152: v1(-18.128,34.4) -13.008,34.4 -11.783,35.625 -6.264,35.625 -6.175,35.536 -6.175,32.75 -4.675,31.25 v1(-2.275,31.25)
NetR10_2: R10.2 S2.G S6.G S10.G S14.G | length 69.6
  Top Layer w0.254: R10.2 -15.15,34.177 -14.802,33.829 v1(-12.625,33.829) ; v1@-12.625,33.884 -12.442,34.067 -11.938,34.067 -11.715,34.29 S14.G@-11.465,34.29 ; v1(-11.625,31.775) -11.625,27.437 -10.896,26.708 -10.896,18.279 v1(-12.625,16.55) -12.431,16.356 -12.431,15.956 -11.715,15.24 S10.G@-11.465,15.24 ; v1(-11.559,12.603) -11.559,8.321 -10.896,7.658 -10.896,3.506 -12.625,1.777 v1(-12.625,-2.65) -12.625,-2.9 -11.715,-3.81 S6.G@-11.465,-3.81 ; S2.G@-11.465,-22.86 -11.715,-22.86 -12.625,-21.95 -12.625,-18.459 -10.896,-16.73 -10.896,-11.392 -11.426,-10.862 v1(-11.426,-6.45)
  Bottom Layer w0.254: v1(-12.625,-2.65) -12.625,-5.199 -11.426,-6.398 v1(-11.426,-6.45) ; v1(-12.625,16.55) -12.625,13.668 v1(-11.559,12.603) ; v1(-12.625,33.829) -12.625,33.538 -11.625,32.538 v1(-11.625,31.775)
NetR11_1: R11.1 U1.20 | length 23.2
  Top Layer w0.152: v1(-3.14,31.829) -2.228,31.829 -1.396,32.66 -1.396,32.772 U1.20
  Top Layer w0.254: v1(-18.128,35.45) -18.043,35.535 -17.74,35.535 -17,36.275 R11.1
  Bottom Layer w0.152: v1(-18.128,35.45) -12.572,35.45 -12.092,35.93 -6.138,35.93 -5.87,35.662 -5.87,32.9 -4.82,31.85 -3.162,31.85 v1(-3.14,31.829)
NetR11_2: R11.2 S2.B S6.B S10.B S14.B | length 72.4
  Top Layer w0.254: R11.2 -11.945,36.5 -11.391,35.946 -7.134,35.946 -6.588,35.4 -6.588,34.513 -6.365,34.29 S14.B -6.115,34.29 -5.031,33.206 -5.031,27.233 -4.546,26.748 -4.546,20.725 -6.365,18.906 -6.365,15.24 -6.115,15.24 -4.975,14.1 -4.975,8.052 -4.546,7.623 -4.546,1.675 -6.365,-0.144 -6.365,-3.81 -6.115,-3.81 -5.458,-4.466 -5.408,-4.466 -4.975,-4.9 -4.975,-10.923 -4.546,-11.352 -4.546,-17.375 -6.365,-19.194 S2.B@-6.365,-22.86
NetR12_1: R12.1 U1.19 | length 25.4
  Top Layer w0.152: v1(-1.975,32.9) U1.19@-1.202,33.673
  Top Layer w0.254: v1(16.76,36.283) 17.467,36.283 R12.1
  Bottom Layer w0.152: v1(-1.975,32.9) -0.709,31.634 -0.709,31.466 -0.504,31.26 4.925,31.26 5.296,31.631 5.296,34.813 6.768,36.285 13.99,36.285 14.074,36.201 16.678,36.201 v1(16.76,36.283)
NetR12_2: R12.2 S3.R S7.R S11.R S15.R | length 79.9
  Top Layer w0.152: S15.R@7.335,32.79 S15.R@7.585,32.79
  Top Layer w0.254: S3.R@7.585,-24.36 7.335,-24.36 4.329,-21.354 4.329,-10.784 3.875,-10.33 3.875,-8.77 S7.R@7.335,-5.31 ; S7.R@7.585,-5.31 S7.R@7.335,-5.31 ; S11.R@7.585,13.74 S11.R@7.335,13.74 ; R12.2 15.625,36.125 7.7,36.125 6.575,35 6.125,35 5.796,34.671 5.796,33.979 6.275,33.5 6.625,33.5 7.335,32.79 7.112,32.567 7.112,32.537 4.925,30.35 4.925,29.919 4.625,29.619 4.587,29.619 3.926,28.958 3.926,27.72 4.329,27.316 4.329,16.746 S11.R@7.335,13.74 ; S7.R@7.335,-5.31 4.329,-2.304 4.329,8.266 3.926,8.67 3.926,9.908 4.587,10.569 4.587,10.992 S11.R@7.335,13.74
NetR13_1: R13.1 U1.18 | length 27.8
  Top Layer w0.152: v1(-2.875,33.05) -2.809,33.05 -2.38,33.479 -2.104,33.479 U1.18
  Top Layer w0.254: v1(16.677,34.1) R13.1
  Bottom Layer w0.152: v1(-2.875,33.05) -2.875,32.982 -2.027,32.133 -1.808,32.133 -0.63,30.955 5.08,30.955 5.601,31.476 5.601,34.686 6.894,35.98 13.095,35.98 14.975,34.1 v1(16.677,34.1)
NetR13_2: R13.2 S3.G S7.G S11.G S15.G | length 76.9
  Top Layer w0.254: v1(6.484,34.32) 6.499,34.305 7.57,34.305 S15.G@7.585,34.29 ; S15.G S15.G@7.585,34.29 ; v1(7.491,12.603) 7.491,8.321 8.154,7.658 8.154,3.431 6.575,1.852 v1(6.575,-2.65) 6.769,-2.844 6.769,-3.244 7.335,-3.81 S7.G@7.585,-3.81 ; v1(7.521,31.653) 7.521,27.341 8.154,26.708 8.154,22.631 6.425,20.902 v1(6.425,16.55) 6.619,16.356 6.619,15.956 7.335,15.24 S11.G@7.585,15.24 ; S3.G@7.585,-22.86 7.335,-22.86 6.425,-21.95 6.425,-18.459 8.154,-16.73 8.154,-11.392 7.625,-10.863 v1(7.625,-6.55) ; S15.G@7.633,34.29 S15.G@7.585,34.29 ; R13.2 15.7,34.325 14.381,35.644 8.053,35.644 7.808,35.4 7.808,34.513 S15.G@7.585,34.29
  Bottom Layer w0.254: v1(6.425,16.55) 6.425,13.668 v1(7.491,12.603) ; v1(6.484,34.32) 6.425,34.261 6.425,32.748 v1(7.521,31.653) ; v1(6.575,-2.65) 6.575,-5.5 v1(7.625,-6.55)
NetR14_1: R14.1 U1.12 | length 31.5
  Top Layer w0.152: v1(-4.375,35.6) -4.225,35.6 U1.12
  Top Layer w0.254: v1(16.677,32) R14.1
  Bottom Layer w0.152: v1(-4.375,35.6) -4.375,34.768 -3.462,33.855 -3.462,32.819 -3.051,32.407 -2.732,32.407 -2.153,31.829 -1.935,31.829 -0.756,30.65 5.225,30.65 5.906,31.331 5.906,34.56 6.871,35.525 7.018,35.672 8.144,35.672 8.147,35.675 12.969,35.675 16.644,32 v1(16.677,32)
NetR14_2: R14.2 S3.B S7.B S11.B S15.B | length 64.6
  Top Layer w0.254: S3.B@12.685,-22.86 12.685,-19.194 14.504,-17.375 14.504,-10.497 13.915,-9.907 13.915,-4.74 13.325,-4.15 13.275,-4.15 12.935,-3.81 12.685,-3.81 12.685,-0.144 14.504,1.675 14.504,7.698 14.075,8.127 14.075,14.15 13.642,14.584 13.592,14.584 12.935,15.24 12.685,15.24 12.685,18.906 14.504,20.725 14.504,26.748 14.075,27.177 v1(14.075,33.2) ; S15.B@12.685,34.29 12.935,34.29 13.592,33.634 13.642,33.634 v1(14.075,33.2) ; R14.2 15.7,32.225 15.025,32.9 14.975,32.9 14.76,33.115 14.16,33.115 v1(14.075,33.2)
  Bottom Layer w0.152: v1(14.075,33.2) v1@14.075,33.348
NetR15_1: R15.1 U1.30 | length 25.2
  Top Layer w0.152: U1.30 3.5,35.072 4.139,34.433 4.139,34.089 v1(4.708,33.519)
  Top Layer w0.254: v1(20.075,32.15) R15.1
  Bottom Layer w0.152: v1(4.708,33.519) 4.687,33.519 4.046,34.16 4.046,34.571 6.369,36.894 14.019,36.894 14.815,37.69 16.171,37.69 17.94,35.922 17.94,34.285 v1(20.075,32.15)
NetR15_2: R15.2 S4.R S8.R S12.R S16.R | length 70
  Top Layer w0.254: R15.2 23.1,32.375 23.448,32.723 23.673,32.723 24.271,33.321 25.854,33.321 26.385,32.79 22.625,29.03 22.625,28.07 23.379,27.316 23.379,16.746 26.385,13.74 24.425,11.78 24.425,11.45 22.976,10.001 22.976,8.67 23.379,8.266 23.379,-2.304 26.385,-5.31 22.976,-8.719 22.976,-10.38 23.546,-10.95 23.546,-21.521 S4.R@26.385,-24.36
NetR16_1: R16.1 U1.29 | length 25.6
  Top Layer w0.152: U1.29 3.73,34.15 3.73,33.655 v1(4.717,32.667)
  Top Layer w0.254: v1(20.075,34.25) R16.1
  Bottom Layer w0.152: v1(4.717,32.667) 3.741,33.643 3.741,34.766 6.175,37.199 13.874,37.199 14.67,37.995 16.33,37.995 v1(20.075,34.25)
NetR16_2: R16.2 S4.G S8.G S12.G S16.G | length 70.1
  Top Layer w0.254: R16.2 v1(25.175,34.25) 25.195,34.27 26.615,34.27 S16.G@26.635,34.29 ; v1(25.325,16.55) 25.325,16.3 26.385,15.24 26.635,15.24 26.635,20.801 27.204,21.37 27.204,26.708 26.525,27.387 26.525,28.287 v1(26.525,31.55) ; S4.G@26.385,-22.86 26.385,-17.549 27.204,-16.73 27.204,-11.392 26.525,-10.713 26.525,-6.463 v1(26.533,-6.455) ; v1(26.525,12.5) 26.525,8.937 26.525,8.337 27.204,7.658 27.204,2.32 26.635,1.751 26.635,-0.89 v1(25.025,-2.5) 25.075,-2.5 26.385,-3.81 S8.G@26.635,-3.81
  Bottom Layer w0.254: v1(25.025,-2.5) 25.025,-4.947 v1(26.533,-6.455) ; v1(25.175,34.25) 26.525,32.9 v1(26.525,31.55) ; v1(25.325,16.55) 25.325,13.7 v1(26.525,12.5)
NetR17_1: R17.1 U1.28 | length 24.3
  Top Layer w0.152: U1.28 2.806,34.38 3.425,33.761 3.425,33.268 3.771,32.923 v1(3.771,32.796)
  Top Layer w0.254: v1(20.075,36.35) R17.1
  Bottom Layer w0.152: v1(3.771,32.796) 3.771,32.944 3.437,33.278 3.437,34.892 6.048,37.504 13.748,37.504 14.544,38.3 18.125,38.3 v1(20.075,36.35)
NetR17_2: R17.2 S4.B S8.B S12.B S16.B | length 73.6
  Top Layer w0.254: R17.2 23.1,36.223 23.448,35.875 31.15,35.875 31.5,35.525 31.5,34.662 31.512,34.65 31.512,34.513 S16.B@31.735,34.29 ; S4.B@31.735,-22.86 31.735,-19.194 33.554,-17.375 33.554,-11.427 33.125,-10.998 33.125,-4.95 31.985,-3.81 31.735,-3.81 31.735,-0.144 33.554,1.675 33.554,7.923 33.125,8.352 33.125,14.6 32.708,15.017 31.958,15.017 31.735,15.24 31.735,18.837 29.896,20.676 29.896,24.168 32.719,26.991 32.719,33.756 32.408,34.067 31.958,34.067 S16.B@31.735,34.29 ; S16.B S16.B@31.735,34.29
NetR18_1: R18.1 S4.1 S8.1 S12.1 S16.1 U1.38 | length 96.7
  Top Layer w0.152: U1.38 4.089,39.671 4.415,39.671 5.32,40.577 5.32,40.795 v1(5.425,40.9)
  Top Layer w0.254: R18.1 21,25.125 S16.1 ; v1(21.425,30.35) 21.425,30.229 21.825,29.829 S16.1 ; S4.1 S8.1 S12.1 22.2,7.275 22.2,25.575 S16.1
  Bottom Layer w0.152: v1(5.425,40.9) 5.53,40.795 5.73,40.795 7.454,39.071 11.171,39.071 11.279,39.179 14.996,39.179 15.506,38.669 19.706,38.669 20.698,37.677 20.698,31.077 v1(21.425,30.35)
NetR19_1: R19.1 S3.1 S7.1 S11.1 S15.1 U1.39 | length 81.7
  Top Layer w0.152: U1.39 3.856,40.145 4.07,40.145 v1(4.175,40.25)
  Top Layer w0.254: R19.1 1.65,24.827 2.773,25.95 S15.1 ; S3.1 S7.1 S11.1 S15.1 ; v1(3.301,31.85) 3.301,28.821 2.775,28.295 S15.1
  Bottom Layer w0.254: v1(3.301,31.85) 3.301,31.971 2.9,32.371 2.9,34.858 4.175,36.133 v1(4.175,40.25)
NetR20_1: R20.1 S2.1 S6.1 S10.1 S14.1 U1.40 | length 108.2
  Top Layer w0.152: S14.1 -16.275,29.703 -18.707,32.135 -18.707,37.443 v1(-11.025,45.125) ; U1.40 3.32,40.317 3.32,40.527 4.025,41.232 v1(4.025,41.258)
  Top Layer w0.254: R20.1 -17.898,19.148 -17.898,21.573 -18.175,21.85 -18.175,24.075 -16.3,25.95 S14.1 S10.1 S6.1 S2.1
  Bottom Layer w0.152: v1(-11.025,45.125) -5.2,45.125 -2.214,42.139 -0.686,42.139 -0.325,42.5 2.825,42.5 4.025,41.3 v1(4.025,41.258)
NetR21_1: R21.1 S1.1 S5.1 S9.1 S13.1 U1.41 | length 116.8
  Top Layer w0.152: R21.1 -35.5,28.075 -35.101,28.474 -35.101,29.001 -32.81,31.292 -32.81,44.094 v1(-32.725,44.179) ; U1.41 2.87,40.574 2.87,40.895 v1(2.975,41)
  Top Layer w0.254: R21.1@-35.586,27.988 -35.325,27.727 S13.1 -35.325,13.095 -34.846,12.616 -34.846,7.379 S9.1 -35.325,-5.955 -34.975,-6.305 -34.975,-11.8 S5.1 -35.325,-24.002 -34.896,-24.431 -34.896,-30.771 S1.1
  Bottom Layer w0.152: v1(-32.725,44.179) -29.559,44.179 -29.364,44.375 -17.122,44.375 -16.927,44.179 -4.685,44.179 -2.341,41.834 -0.391,41.834 -0.175,42.05 1.925,42.05 v1(2.975,41)
NetS1_+: S1.+ S2.+ S3.+ S4.+ U2.3 | length 76.4
  Top Layer w0.254: U2.3 -34.403,-23.222 -34.403,-24.034 v1(-34.281,-24.156) ; S1.+@-25.415,-24.36 -25.375,-24.4 v1(-25.375,-25.9) ; S2.+@-6.365,-24.36 -6.325,-24.4 v1(-6.325,-26.05) ; S3.+@12.685,-24.36 12.725,-24.4 v1(12.725,-26.05) ; v1(31.625,-26.05) 31.625,-24.47 S4.+@31.735,-24.36
  Bottom Layer w0.254: v1(-34.281,-24.156) -34.281,-24.219 -32.088,-26.412 -29.337,-26.412 -28.826,-25.9 v1(-25.375,-25.9) -18.426,-25.9 -17.662,-26.664 -11.046,-26.664 -10.356,-25.974 -6.401,-25.974 v1(-6.325,-26.05) 0.85,-26.05 1.211,-26.412 8.052,-26.412 8.49,-25.974 12.649,-25.974 v1(12.725,-26.05) 19.845,-26.05 20.33,-26.535 27.175,-26.535 27.736,-25.974 31.549,-25.974 v1(31.625,-26.05)
NetS5_+: S5.+ S6.+ S7.+ S8.+ U3.3 | length 77
  Top Layer w0.254: U3.3 -34.518,-4.657 -34.518,-5.357 v1(-34.375,-5.5) ; S5.+@-25.415,-5.31 -25.192,-5.533 -24.892,-5.533 -24.625,-5.8 v1(-24.625,-7) ; S6.+@-6.365,-5.31 -6.325,-5.35 v1(-6.325,-7.15) ; S7.+@12.685,-5.31 12.725,-5.35 v1(12.725,-7.286) ; v1(31.625,-7) 31.625,-5.42 S8.+@31.735,-5.31
  Bottom Layer w0.254: v1(-34.375,-5.5) -32.513,-7.362 -28.94,-7.362 -28.579,-7 v1(-24.625,-7) -17.855,-7 -17.493,-7.362 -10.998,-7.362 -10.56,-6.924 -6.826,-6.924 -6.6,-7.15 0.82,-7.15 1.134,-7.464 8.004,-7.464 8.544,-6.924 12.089,-6.924 12.45,-7.286 v1(12.725,-7.286) ; v1@12.725,-7.3 12.795,-7.37 26.912,-7.37 27.357,-6.924 31.549,-6.924 v1(31.625,-7)
NetS9_+: S9.+ S10.+ S11.+ S12.+ U4.3 | length 75.7
  Top Layer w0.254: U4.3 -34.318,14.193 -34.318,13.379 v1(-34.161,13.222) ; S9.+@-25.415,13.74 -25.375,13.7 v1(-25.375,12.5) ; S10.+@-6.365,13.74 -6.325,13.7 v1(-6.325,12.5) ; S11.+@12.685,13.74 12.725,13.7 v1(12.725,12.2) ; v1(31.625,12.2) 31.625,13.63 S12.+@31.735,13.74
  Bottom Layer w0.254: v1(-34.161,13.222) -34.161,12.545 -33.442,11.825 -26.05,11.825 v1(-25.375,12.5) -24.563,11.688 -10.465,11.688 -9.928,12.225 -6.697,12.225 -6.422,12.5 v1(-6.325,12.5) -5.513,11.688 8.585,11.688 9.097,12.2 v1(12.725,12.2) 12.933,12.2 13.548,11.586 27.532,11.586 28.147,12.2 v1(31.625,12.2)
NetS13_+: S13.+ S14.+ S15.+ S16.+ U5.3 | length 77.3
  Top Layer w0.254: v1(-34.825,32.6) -34.837,32.612 -34.837,33.588 U5.3 ; S13.+@-25.415,32.79 -25.375,32.75 v1(-25.375,31.55) ; S14.+@-6.365,32.79 -6.325,32.75 v1(-6.325,30.8) ; S15.+@12.685,32.79 12.725,32.75 v1(12.725,31.55) ; S16.+@31.735,32.79 31.775,32.75 v1(31.775,31.4)
  Bottom Layer w0.254: v1(-34.825,32.6) -33.248,31.023 -25.902,31.023 v1(-25.375,31.55) -24.625,30.8 v1(-6.325,30.8) -5.725,30.8 -4.975,30.05 7.897,30.05 9.147,31.3 12.354,31.3 12.604,31.55 v1(12.725,31.55) 14.249,30.026 19.939,30.026 20.245,29.721 21.92,29.721 22.226,30.026 26.923,30.026 28.297,31.4 v1(31.775,31.4)
NetU1_8: U1.8 U2.1 | length 105.7
  Top Layer w0.254: v1(-36.175,41.6) -37.692,40.083 -37.692,-23.033 -35.475,-25.25 U2.1 ; v1(-4.092,40.033) -4.092,39.862 -4.114,39.839 -4.114,39.579 -3.495,38.959 -3.203,38.959 -2.619,38.375 U1.8
  Bottom Layer w0.254: v1(-36.175,41.6) -34.225,43.55 -29.686,43.55 -29.217,44.019 -18.755,44.019 -18.286,43.55 -7.608,43.55 v1(-4.092,40.033)
USB_N: R2.2 U1.3 | length 26.6
  Top Layer w0.152: v1(-1.375,42.95) -1.474,42.851 -1.789,42.851 -1.954,42.687 -1.954,41.181 -1.247,40.475 -1.207,40.475 -0.875,40.143 U1.3 ; v1(17.225,39.407) 17.365,39.407 17.588,39.63 17.919,39.63 18.009,39.541 18.009,39.175 R2.2
  Bottom Layer w0.152: v1(-1.375,42.95) -1.276,43.049 -1.276,43.364 -0.747,43.894 6.353,43.894 10.616,39.63 16.625,39.63 16.862,39.63 17.085,39.407 v1(17.225,39.407)
USB_P: R3.2 U1.4 | length 27.6
  Top Layer w0.152: v1(-1.978,43.553) -2.077,43.454 -2.077,43.138 -2.36,42.855 -2.36,41.013 -1.534,40.187 -1.534,40.147 -1.202,39.816 U1.4 ; v1(17.225,40.26) 17.365,40.26 17.588,40.037 17.919,40.037 18.009,40.126 18.009,40.492 R3.2
  Bottom Layer w0.152: v1(-1.978,43.553) -1.879,43.652 -1.563,43.652 -0.915,44.3 6.522,44.3 10.785,40.037 16.862,40.037 17.085,40.26 v1(17.225,40.26)
USBC_N: J2.A7 J2.B7 R2.1 | length 16.7
  Top Layer w0.152: R2.1 20.641,39.175 20.641,39.541 20.731,39.63 21.07,39.63 21.162,39.723 21.662,39.723 21.885,39.5 v1(22.025,39.5) ; J2.A7@29.975,38.25 29.979,38.246 29.979,37.255 v1(29.984,37.251)
  Bottom Layer w0.152: v1(22.025,39.5) 22.826,38.699 cw(c22.702,38.574) 22.826,38.449 22.682,38.305 ccw(c22.807,38.18) 22.682,38.056 ccw(c22.807,38.18) 22.931,38.056 23.076,38.2 cw(c23.2,38.076) 23.325,38.2 23.85,37.675 25.4,36.125 29.325,36.125 29.962,36.762 29.962,37.229 30.428,37.695 30.428,39.037 30.625,39.234 J2.B7@30.625,39.35
USBC_P: J2.A6 J2.B6 R3.1 | length 16.7
  Top Layer w0.152: R3.1 20.641,40.492 20.641,40.126 20.731,40.037 20.901,40.037 20.994,40.129 21.662,40.129 21.885,40.352 v1(22.025,40.352) ; v1(29.15,36.875) 29.255,36.77 29.646,36.77 29.744,36.672 30.224,36.672 30.563,37.011 30.563,37.491 30.475,37.578 J2.A6@30.475,38.25
  Bottom Layer w0.152: v1(22.025,40.352) 25.502,36.875 v1@29.11,36.875 ; v1(29.15,36.875) v1@29.11,36.875 ; J2.B6@29.825,39.35 29.857,39.318 29.857,38.203 29.579,37.926 29.11,37.457 v1@29.11,36.875
pads on no net: Designator1.Fiducial Designator2.Fiducial Designator3.Fiducial J2.13 J2.14 J2.A2 J2.A3 J2.A8 J2.A10 J2.A11 J2.B2 J2.B3 J2.B8 J2.B10 J2.B11 S1. S2. S3. S4. S5. S6. S7. S8. S9. S10. S11. S12. S13. S14. S15. S16. U1.1

## Polygon pours and split planes (outlines as drawn)
GND on Bottom Layer "GND_Plane" (solid, remove dead copper, pour order 3): -35.752,46.7 36.825,46.7 42.125,41.4 42.125,-33 36.824,-38.301 -40.875,-38.301 -40.875,41.719

## Keep-outs
Keep-Out Layer:
  lines w0.2: -40.875,-32.451 ccw(c-39.526,-32.45) -39.525,-33.8 cw(c-39.525,-36.95) -36.375,-36.95 ccw(c-35.025,-36.95) -35.025,-38.3 36.275,-38.3 ccw(c36.275,-36.95) 37.625,-36.95 cw(c40.775,-36.95) 40.775,-33.8 ccw(c40.775,-32.45) 42.125,-32.45 42.125,40.85 ccw(c40.775,40.85) 40.775,42.2 cw(c40.762,45.337) 37.625,45.325 ccw(c36.263,45.338) 36.275,46.7 -35.025,46.7 ccw(c-35.025,45.35) -36.375,45.35 cw(c-39.521,45.346) -39.525,42.2 ccw(c-39.525,40.85) -40.875,40.85 -40.875,-32.451

## Silkscreen, mask and mechanical layers (free items; w line width, h text height)
Top Overlay:
  text "MISO" at -24.521,43.179 h0.89
  text "SLC" at -20.121,43.129 h0.89
  text "GND" at -28.146,43.079 h0.89
  text "RST" at -26.146,39.429 h0.89
  text "MOSI" at -22.371,39.404 h0.89
  text "5V" at -17.721,39.404 h0.89
  text "IB" at -29.646,23.654 h1.52
Mechanical 1:
  lines w0.2: -40.875,-32.451 ccw(c-39.526,-32.45) -39.525,-33.8 cw(c-39.525,-36.95) -36.375,-36.95 ccw(c-35.025,-36.95) -35.025,-38.3 36.275,-38.3 ccw(c36.275,-36.95) 37.625,-36.95 cw(c40.775,-36.95) 40.775,-33.8 ccw(c40.775,-32.45) 42.125,-32.45 42.125,40.85 ccw(c40.775,40.85) 40.775,42.2 cw(c40.763,45.338) 37.625,45.325 ccw(c36.263,45.338) 36.275,46.7 -35.025,46.7 ccw(c-35.025,45.35) -36.375,45.35 cw(c-39.525,45.35) -39.525,42.2 ccw(c-39.525,40.85) -40.875,40.85 -40.875,-32.451